# Altium PCB SolarArray2.PcbDoc
Units mm, origin at the board's own origin, x right, y up, seen from the top; angles counter-clockwise.
Board outline 82 x 320 mm, 2 copper layers (Top Layer, Bottom Layer), stack 1.567 mm thick; 67 components, 37 nets, 167 pads, 3 vias.
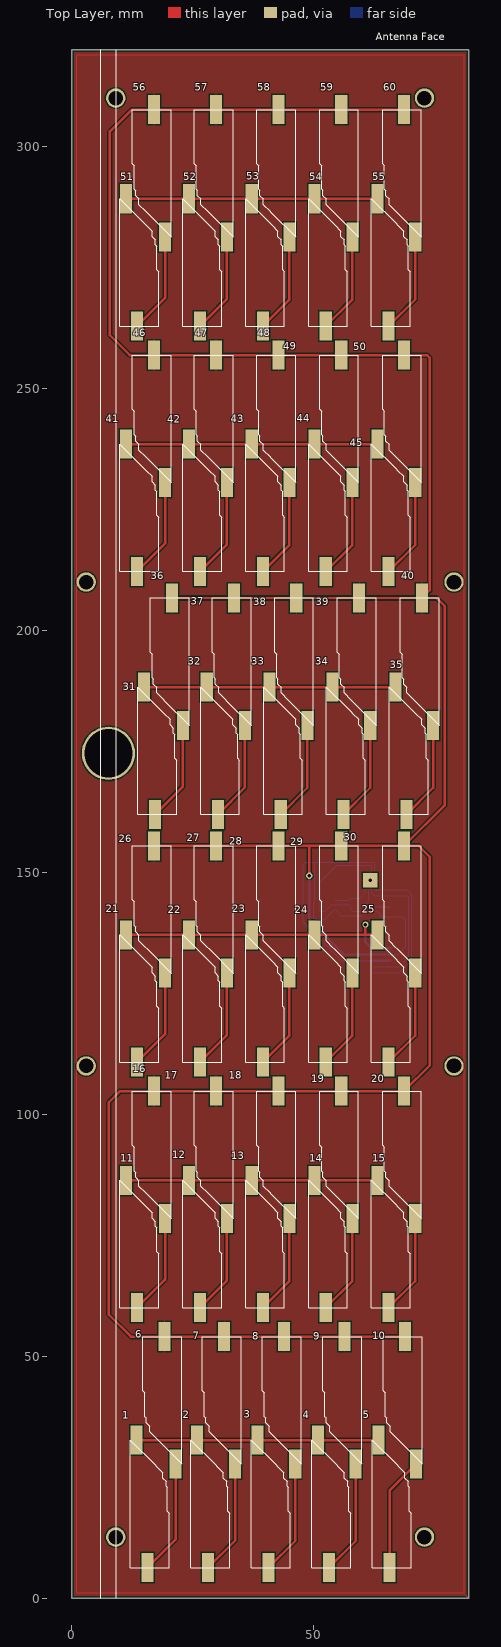
[diagram p0: Top Layer view]
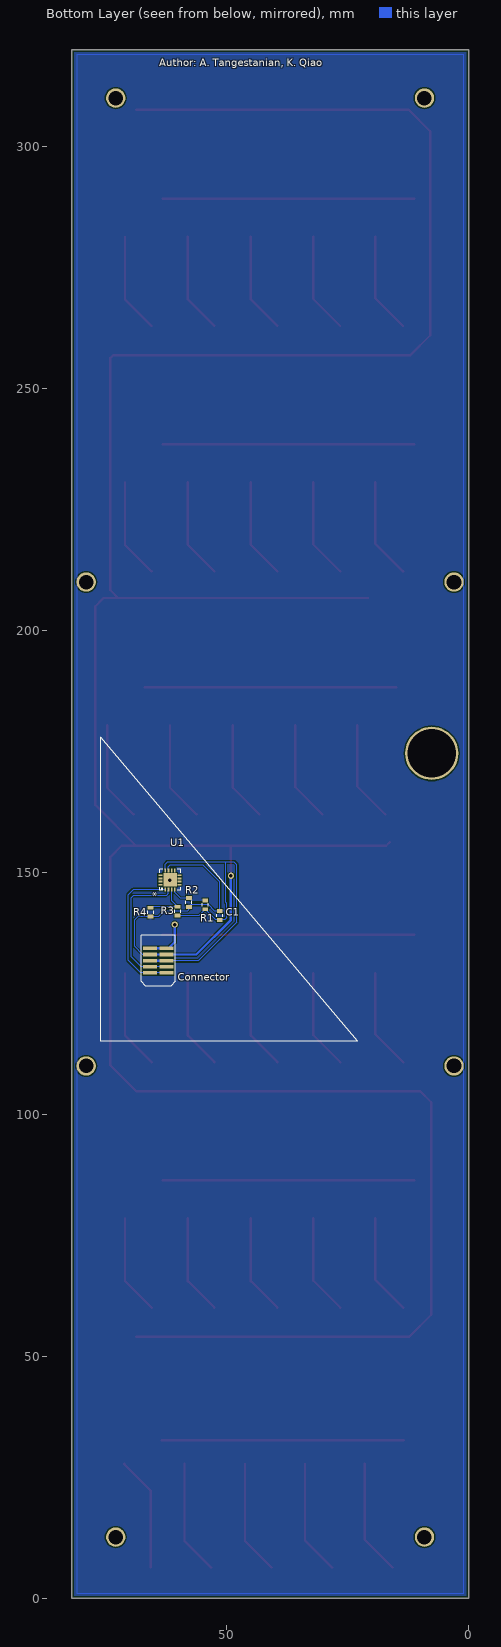
[diagram p1: Bottom Layer view, seen from below]
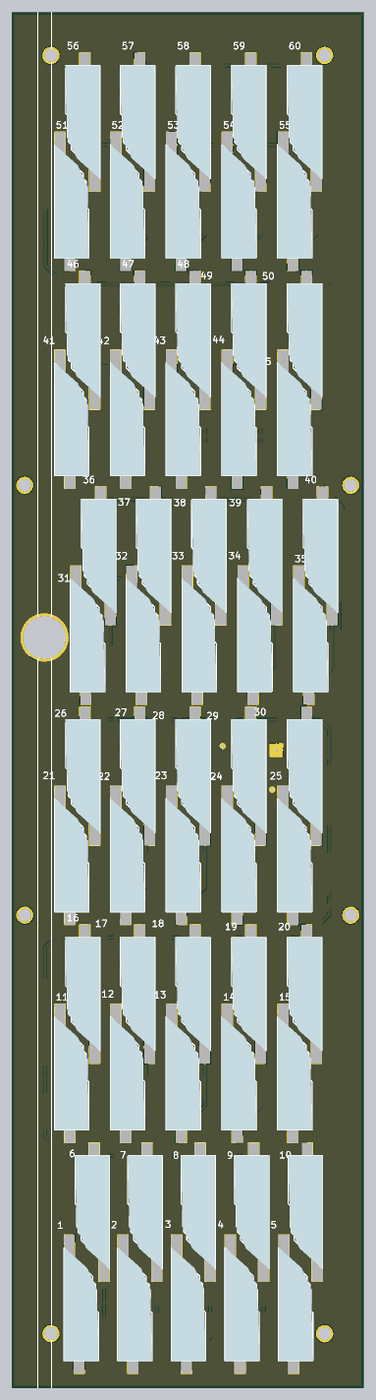
[diagram p2: 3D render of the assembled board from above, using the file's embedded part models]

## Layer stack, top to bottom
Top Solder: solder mask 0.0102, Solder Resist, Dk 3.5
Top Layer: signal copper 0.0356
Dielectric 1: dielectric 1.4961, FR-4, Dk 4.8
Bottom Layer: signal copper 0.0356
Bottom Solder: solder mask 0.0102, Solder Resist, Dk 3.5

## Board outline
82,0 82,320 0,320 0,0

## Design rules (kind name [scope] priority, off if disabled: settings)
Clearance [All] p1: gap=0.254 ignorepadtopadclearanceinfootprint=FALSE except(0: Arc-Hole Track-Hole SMDPad-Hole THPad-Hole Via-Hole Fill-Hole Poly-Hole Region-Hole Text-Hole)
PolygonConnect [All] p1: connectstyle=Relief reliefconductorwidth=0.254 reliefentries=4 polygonreliefangle="90 Angle" airgapwidth=0.254
RoutingVias [All] p1: holewidth=0.711 width=1.27 viastyle="Through Hole" minholewidth=0.711 minwidth=1.27 maxholewidth=0.711 maxwidth=1.27
SolderMaskExpansion [All] p1: expansion=0.102
Width [All] p1: maxlimit=1 minlimit=0.254 preferedwidth=0.254 minimp=50.000000 maximp=50.000000 favimp=50.000000
30 further rules are at their usual default settings.

## Components (designator, comment, footprint, x,y, rotation, side; value= is the part's Value field where it differs from the comment)
1 "Trisol X Solar Wing" PCBComponent_1 12.144,35.83 r270 top
2 "Trisol X Solar Wing" PCBComponent_1 24.644,35.83 r270 top
3 "Trisol X Solar Wing" PCBComponent_1 37.144,35.83 r270 top
4 "Trisol X Solar Wing" PCBComponent_1 49.644,35.83 r270 top
5 "Trisol X Solar Wing" PCBComponent_1 62.144,35.83 r270 top
6 "Trisol X Solar Wing" PCBComponent_1 22.756,24.602 r90 top
7 "Trisol X Solar Wing" PCBComponent_1 35.056,24.602 r90 top
8 "Trisol X Solar Wing" PCBComponent_1 47.456,24.602 r90 top
9 "Trisol X Solar Wing" PCBComponent_1 59.956,24.602 r90 top
10 "Trisol X Solar Wing" PCBComponent_1 72.456,24.602 r90 top
11 "Trisol X Solar Wing" PCBComponent_1 9.944,89.53 r270 top
12 "Trisol X Solar Wing" PCBComponent_1 22.944,89.53 r270 top
13 "Trisol X Solar Wing" PCBComponent_1 35.944,89.53 r270 top
14 "Trisol X Solar Wing" PCBComponent_1 48.944,89.53 r270 top
15 "Trisol X Solar Wing" PCBComponent_1 61.944,89.53 r270 top
16 "Trisol X Solar Wing" PCBComponent_1 20.556,75.336 r90 top
17 "Trisol X Solar Wing" PCBComponent_1 33.356,75.336 r90 top
18 "Trisol X Solar Wing" PCBComponent_1 46.256,75.336 r90 top
19 "Trisol X Solar Wing" PCBComponent_1 59.256,75.336 r90 top
20 "Trisol X Solar Wing" PCBComponent_1 72.256,75.336 r90 top
21 "Trisol X Solar Wing" PCBComponent_1 9.944,140.264 r270 top
22 "Trisol X Solar Wing" PCBComponent_1 22.944,140.264 r270 top
23 "Trisol X Solar Wing" PCBComponent_1 35.944,140.264 r270 top
24 "Trisol X Solar Wing" PCBComponent_1 48.944,140.264 r270 top
25 "Trisol X Solar Wing" PCBComponent_1 61.944,140.264 r270 top
26 "Trisol X Solar Wing" PCBComponent_1 20.556,126.036 r90 top
27 "Trisol X Solar Wing" PCBComponent_1 33.356,126.036 r90 top
28 "Trisol X Solar Wing" PCBComponent_1 46.256,126.036 r90 top
29 "Trisol X Solar Wing" PCBComponent_1 59.256,126.036 r90 top
30 "Trisol X Solar Wing" PCBComponent_1 72.256,126.036 r90 top
31 "Trisol X Solar Wing" PCBComponent_1 13.644,191.464 r270 top
32 "Trisol X Solar Wing" PCBComponent_1 26.644,191.464 r270 top
33 "Trisol X Solar Wing" PCBComponent_1 39.644,191.464 r270 top
34 "Trisol X Solar Wing" PCBComponent_1 52.644,191.464 r270 top
35 "Trisol X Solar Wing" PCBComponent_1 65.644,191.464 r270 top
36 "Trisol X Solar Wing" PCBComponent_1 24.256,177.236 r90 top
37 "Trisol X Solar Wing" PCBComponent_1 37.056,177.236 r90 top
38 "Trisol X Solar Wing" PCBComponent_1 49.956,177.236 r90 top
39 "Trisol X Solar Wing" PCBComponent_1 62.956,177.236 r90 top
40 "Trisol X Solar Wing" PCBComponent_1 75.956,177.236 r90 top
41 "Trisol X Solar Wing" PCBComponent_1 9.944,241.664 r270 top
42 "Trisol X Solar Wing" PCBComponent_1 22.944,241.664 r270 top
43 "Trisol X Solar Wing" PCBComponent_1 35.944,241.664 r270 top
44 "Trisol X Solar Wing" PCBComponent_1 48.944,241.664 r270 top
45 "Trisol X Solar Wing" PCBComponent_1 61.944,241.664 r270 top
46 "Trisol X Solar Wing" PCBComponent_1 20.556,227.436 r90 top
47 "Trisol X Solar Wing" PCBComponent_1 33.356,227.436 r90 top
48 "Trisol X Solar Wing" PCBComponent_1 46.256,227.436 r90 top
49 "Trisol X Solar Wing" PCBComponent_1 59.256,227.436 r90 top
50 "Trisol X Solar Wing" PCBComponent_1 72.256,227.436 r90 top
51 "Trisol X Solar Wing" PCBComponent_1 9.944,292.364 r270 top
52 "Trisol X Solar Wing" PCBComponent_1 22.944,292.364 r270 top
53 "Trisol X Solar Wing" PCBComponent_1 35.944,292.364 r270 top
54 "Trisol X Solar Wing" PCBComponent_1 48.944,292.364 r270 top
55 "Trisol X Solar Wing" PCBComponent_1 61.944,292.364 r270 top
56 "Trisol X Solar Wing" PCBComponent_1 20.556,278.164 r90 top
57 "Trisol X Solar Wing" PCBComponent_1 33.356,278.164 r90 top
58 "Trisol X Solar Wing" PCBComponent_1 46.256,278.164 r90 top
59 "Trisol X Solar Wing" PCBComponent_1 59.256,278.164 r90 top
60 "Trisol X Solar Wing" PCBComponent_1 72.256,278.164 r90 top
C1 "100pF" 0805 51.4,141.1 r270 bottom
Connector "TFC-105-02-F-D" TFC-105-X2-XX-D 64.114,131.76 r270 bottom
R1 "1K" 0805 54.4,143.3 r270 bottom
R2 "1K" 0805 57.8,143.8 r270 bottom
R3 "1K" 0805 60.1,142 r270 bottom
R4 "1K" 0805 65.7,141.8 r270 bottom
U1 "ADT7420UCPZ-R2" CP_16_17 61.675,148.431 r90 bottom

## Footprints (in the part's own frame and the unit in brackets; to place one, negate y for a bottom-side part, rotate by r counter-clockwise, add the part's x,y. Pads: shape width x height; smd on the part's side, far side on the other; paste and mask are expansions set on the pad)
0805 [mil]
  rect 32x48 smd: 1(-35.43,0) 2(36,0)
  silkscreen extent -12,-24 12,24
CP_16_17 [mil]
  rect 30x14 smd: 1(-77.5,38.39) 2(-77.5,12.8) 3(-77.5,-12.8) 4(-77.5,-38.39) 9(77.5,-38.39) 10(77.5,-12.8) 11(77.5,12.8) 12(77.5,38.39)
  rect 14x30 smd: 5(-38.39,-77.5) 6(-12.8,-77.5) 7(12.8,-77.5) 8(38.39,-77.5) 13(38.39,77.5) 14(12.8,77.5) 15(-12.8,77.5) 16(-38.39,77.5)
  rect 110x110 smd paste-54.5: 17(0,0)
  silkscreen extent -86,-86 86,86, body extent -81,-81 81,81, height 30
PCBComponent_1 [mm]
  rect 6x2.5 smd: 0(3.164,1.27) 1(29.464,3.556)
  silkscreen extent 3.16,0 29.46,8.03, body extent 3.16,0.06 29.46,8.06, height 0.32
TFC-105-X2-XX-D [mil]
  rect 29x115 smd mask+2: 1(-100,-67.5) 2(-100,67.5) 3(-50,-67.5) 4(-50,67.5) 5(0,-67.5) 6(0,67.5) 7(50,-67.5) 8(50,67.5) 9(100,-67.5) 10(100,67.5)
  silkscreen extent -208,-140 207,140, body extent -192,-122 183,113, height 220

## Part data
C1: library part CAP0805_1nF
R1 R2 R3 R4: library part RESISTOR0805-RES_1K
U1: "Imported"

## Free pads (board coordinates)
  rect 3x3 smd paste-1.384: 5(61.7,148.4)
  round 11 hole 10: 7(7.6,174.6)
  round 4 hole 3: 8(9.1,310) 9(3,110) 10(3,210) 11(9.1,12.65) 12(72.9,310) 13(79,210) 14(79,110) 15(72.9,12.65)

## Via types
v1: diameter 1.27, hole 0.711, Top Layer to Bottom Layer, 3 vias

## Nets (pads, with @x,y where several pads share a name; then routed paths per layer and width w, separated by ;. In a path a pad name is that pad's centre, name@x,y a point inside that pad or via, vN(x,y) a via of type N, cw(c..) or ccw(c..) an arc to the next point about the centre after c; other vN are vias at no path point)
Net1_0: 1.0 2.0 3.0 4.0 5.0 11.0 12.0 13.0 14.0 15.0 21.0 22.0 23.0 24.0 25.0 31.0 32.0 33.0 34.0 35.0 41.0 42.0 43.0 44.0 45.0 51.0 52.0 53.0 54.0 55.0 Connector.1 Connector.2 | length 321.4
  Top Layer w0.508: 11.0 12.0 13.0 14.0 15.0 ; 21.0 22.0 23.0 24.0 60.7,137.1 ; 41.0 42.0 43.0 44.0 45.0 ; 51.0 52.0 53.0 54.0 55.0 ; 1.0 2.0 3.0 4.0 5.0 ; 31.0 32.0 33.0 34.0 35.0 ; v1(60.7,139.2) 60.7,137.1 ; 25.0 60.7,137.1
  Bottom Layer w0.254: Connector.2@62,134.3 Connector.2
  Bottom Layer w0.508: v1(60.7,139.2) 60.7,135.6 Connector.2@62,134.3 ; Connector.2 Connector.1
Net1_1: 1.1 6.0 | length 23.8
  Top Layer w0.508: 1.1 21.486,12.152 6.0
Net2_1: 2.1 7.0 | length 23.7
  Top Layer w0.508: 2.1 33.786,11.952 7.0
Net3_1: 3.1 8.0 | length 23.7
  Top Layer w0.508: 3.1 46.186,11.852 8.0
Net4_1: 4.1 9.0 | length 23.7
  Top Layer w0.508: 4.1 58.686,11.852 9.0
Net5_1: 5.1 10.0 | length 23.7
  Top Layer w0.508: 5.1 65.7,22.28 10.0
Net6_1: 6.1 7.1 8.1 9.1 10.1 16.1 17.1 18.1 19.1 20.1 26.1 27.1 28.1 29.1 30.1 36.1 37.1 38.1 39.1 40.1 46.1 47.1 48.1 49.1 50.1 56.1 57.1 58.1 59.1 60.1 C1.1 Connector.3 Connector.4 pad.5 R2.2 R4.2 U1.11 U1.17 | length 694.6
  Top Layer w0.508: 26.1@16.3,156.2 26.1 27.1 28.1 49.1,155.5 ; 36.1 37.1 38.1 39.1 40.1 ; v1(49.1,149.3) 49.1,155.5 ; 10.1@68.7,54.066 9.1 8.1 7.1 6.1 12.234,54.066 7.7,58.6 7.7,102.5 10,104.8 16.1 17.1 18.1 19.1 20.1 74,110.1 74,153.2 71.7,155.5 30.1 ; 60.1 59.1 58.1 57.1 56.1 12.428,307.628 7.9,303.1 7.9,261 12,256.9 46.1 47.1 48.1 49.1 50.1 73.4,256.9 74,256.3 74,208.3 40.1 ; 49.1,155.5 29.1 30.1 ; 30.1 77.1,163.9 77.1,205 75.4,206.7 40.1
  Bottom Layer w0.254: U1.11 62,151.2 61.7,151.5 54.8,151.5 51.4,148.1 C1.1 52.4,142 53.7,143.3 57.386,143.3 R2.2 57.8,142.3 58.1,142 62.986,142 64.1,140.886 R4.2 68.314,140.886 69,140.2 69,134.7 67.33,133.03 Connector.3
  Bottom Layer w0.508: v1(49.1,149.3) 49.1,140.2 56.27,133.03 Connector.4 Connector.3
  other v1: 61.7,148.4
Net11_1: 11.1 16.0 | length 20.8
  Top Layer w0.508: 11.1 19.286,65.852 16.0
Net12_1: 12.1 17.0 | length 20.7
  Top Layer w0.508: 12.1 32.086,65.652 17.0
Net13_1: 13.1 18.0 | length 20.7
  Top Layer w0.508: 13.1 44.986,65.552 18.0
Net14_1: 14.1 19.0 | length 20.7
  Top Layer w0.508: 14.1 57.986,65.552 19.0
Net15_1: 15.1 20.0 | length 20.7
  Top Layer w0.508: 15.1 70.986,65.552 20.0
Net21_1: 21.1 26.0 | length 20.8
  Top Layer w0.508: 21.1 19.286,116.586 26.0
Net22_1: 22.1 27.0 | length 20.7
  Top Layer w0.508: 22.1 32.086,116.386 27.0
Net23_1: 23.1 28.0 | length 20.7
  Top Layer w0.508: 23.1 44.986,116.286 28.0
Net24_1: 24.1 29.0 | length 20.7
  Top Layer w0.508: 24.1 57.986,116.286 29.0
Net25_1: 25.1 30.0 | length 20.7
  Top Layer w0.508: 25.1 70.986,116.286 30.0
Net31_1: 31.1 36.0 | length 20.8
  Top Layer w0.508: 31.1 22.986,167.786 36.0
Net32_1: 32.1 37.0 | length 20.7
  Top Layer w0.508: 32.1 35.786,167.586 37.0
Net33_1: 33.1 38.0 | length 20.7
  Top Layer w0.508: 33.1 48.686,167.486 38.0
Net34_1: 34.1 39.0 | length 20.7
  Top Layer w0.508: 34.1 61.686,167.486 39.0
Net35_1: 35.1 40.0 | length 20.7
  Top Layer w0.508: 35.1 74.686,167.486 40.0
Net41_1: 41.1 46.0 | length 20.8
  Top Layer w0.508: 41.1 19.286,217.986 46.0
Net42_1: 42.1 47.0 | length 20.7
  Top Layer w0.508: 42.1 32.086,217.786 47.0
Net43_1: 43.1 48.0 | length 20.7
  Top Layer w0.508: 43.1 44.986,217.686 48.0
Net44_1: 44.1 49.0 | length 20.7
  Top Layer w0.508: 44.1 57.986,217.686 49.0
Net45_1: 45.1 50.0 | length 20.7
  Top Layer w0.508: 45.1 70.986,217.686 50.0
Net51_1: 51.1 56.0 | length 20.8
  Top Layer w0.508: 51.1 19.286,268.686 56.0
Net52_1: 52.1 57.0 | length 20.7
  Top Layer w0.508: 52.1 32.086,268.486 57.0
Net53_1: 53.1 58.0 | length 20.7
  Top Layer w0.508: 53.1 44.986,268.386 58.0
Net54_1: 54.1 59.0 | length 20.7
  Top Layer w0.508: 54.1 57.986,268.386 59.0
Net55_1: 55.1 60.0 | length 20.7
  Top Layer w0.508: 55.1 70.986,268.386 60.0
NetC1_2: C1.2 Connector.5 Connector.6 R1.2 R3.2 U1.12 | length 72.9
  Bottom Layer w0.254: R3.2 55.7,141.086 R1.2 52.2,140.186 C1.2 50.414,140.186 50,140.6 50,143.625 50.2,143.825 50.2,152.1 ; Connector.6 55.84,131.76 47.9,139.7 47.9,151.6 48.4,152.1 50.2,152.1 ; U1.12 62.65,151.725 62.275,152.1 50.2,152.1
  Bottom Layer w0.508: Connector.6 Connector.5
NetConnector_7: Connector.7 Connector.8 U1.2 | length 29.2
  Bottom Layer w0.254: U1.2 62,145.7 62.5,145.2 69.3,145.2 69.7,144.8 69.7,132.6 67.59,130.49 Connector.7 Connector.8
NetConnector_9: Connector.9 Connector.10 U1.1 | length 30.7
  Bottom Layer w0.254: Connector.10 Connector.9 67.72,129.22 70.3,131.8 70.3,145.4 69.3,146.4 62.713,146.4 U1.1
NetR1_1: R1.1 R2.1 U1.4 | length 7.6
  Bottom Layer w0.254: R1.1 57.3,144.2 R2.1 59.5,144.7 60.7,145.9 U1.4
NetR3_1: R3.1 R4.1 U1.3 | length 9.8
  Bottom Layer w0.254: U1.3 61.35,144.15 R3.1 65.5,142.9 R4.1
pads on no net: U1.5 U1.6 U1.7 U1.8 U1.9 U1.10 U1.13 U1.14 U1.15 U1.16

## Polygon pours and split planes (outlines as drawn)
Net6_1 on Bottom Layer (solid, pour order 8): 0.5,319.5 81.5,319.5 81.5,0.5 0.5,0.5
Net6_1 on Bottom Layer "Array_neg" (solid, shelved, pour order 2): 1,319 81,319 81,1 1,1
Net6_1 on Top Layer (solid, pour order 6): 0.5,319.5 81.5,319.5 81.5,0.5 0.5,0.5
Net1_0 on Top Layer "Array_pos" (solid, shelved, pour order 4): 1,319 81,319 81,1 82,0 81,1 1,1

## Silkscreen, mask and mechanical layers (free items; w line width, h text height)
Top Overlay:
  lines w0.254: 6.011,0 6.011,320 ; 9.21,0 9.21,320
  text "Antenna Face" at 62.8,322 h1.52
Bottom Overlay:
  lines w0.254: 22.868,115.1 76.026,177.89 76.026,115.1 22.868,115.1
  text "Author: A. Tangestanian, K. Qiao" at 63.9,316.6 h1.52

## Text inside footprints (layer, text, board x,y; h text height)
Connector: Mechanical 1 "J1" at 68.89,132.206 h0.76 r90
U1: Bottom Overlay "*" at 63.834,145.002 h1.52 r270